# Altium PCB PCB2.PcbDoc
Units mil, origin at the board's own origin, x right, y up, seen from the top; angles counter-clockwise.
Board outline 2295 x 2275 mil, 2 copper layers (Top Layer, Bottom Layer); 65 components, 55 nets, 272 pads, 127 vias.
Unrouted connection lines stored in the file: 4.
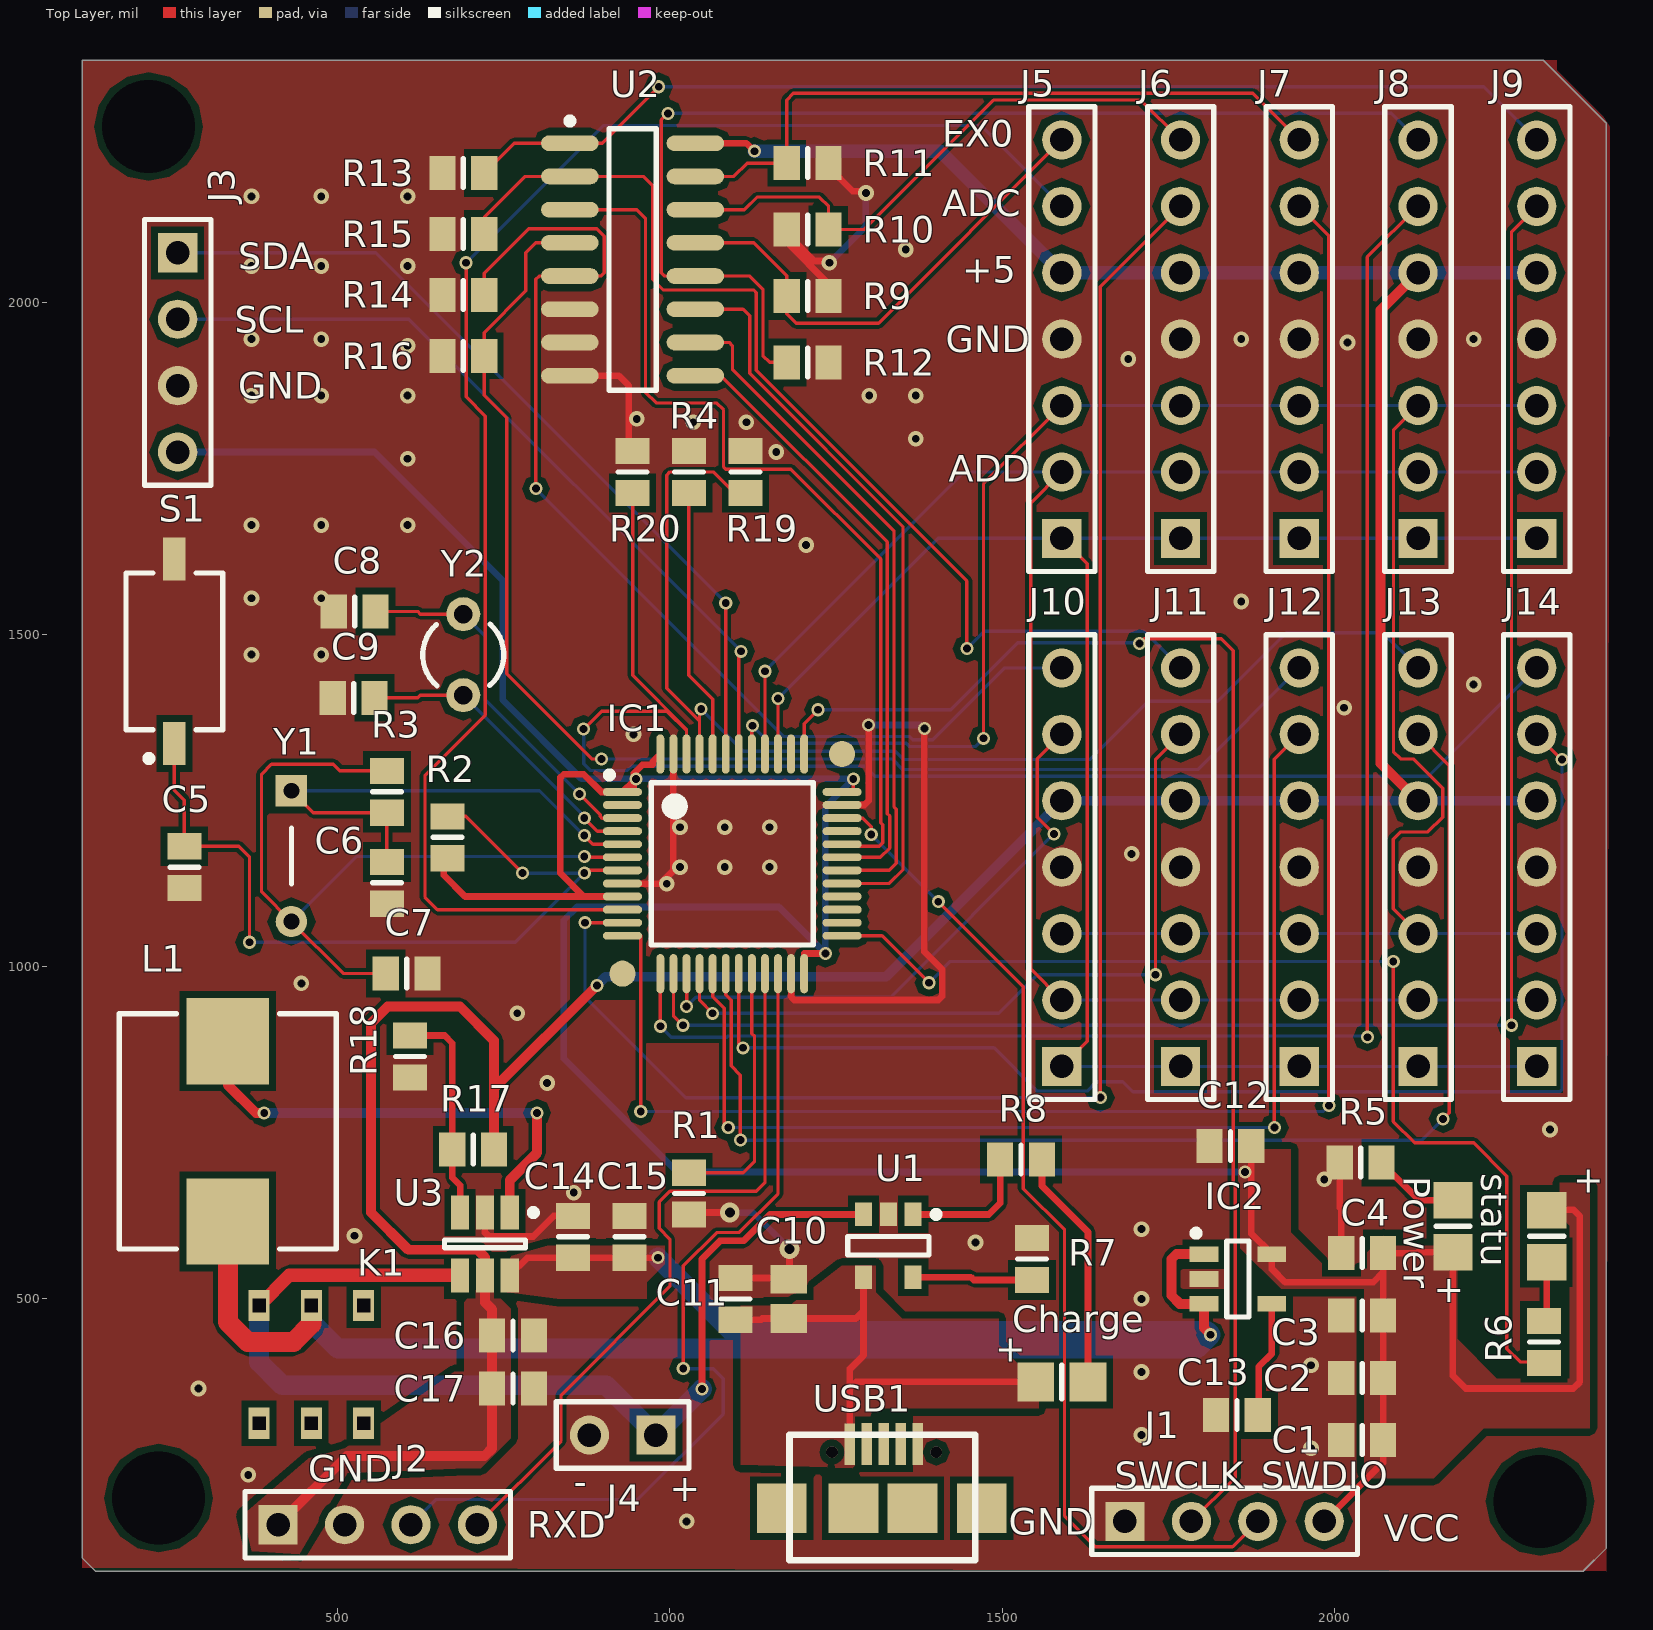
[diagram p0: Top Layer view]
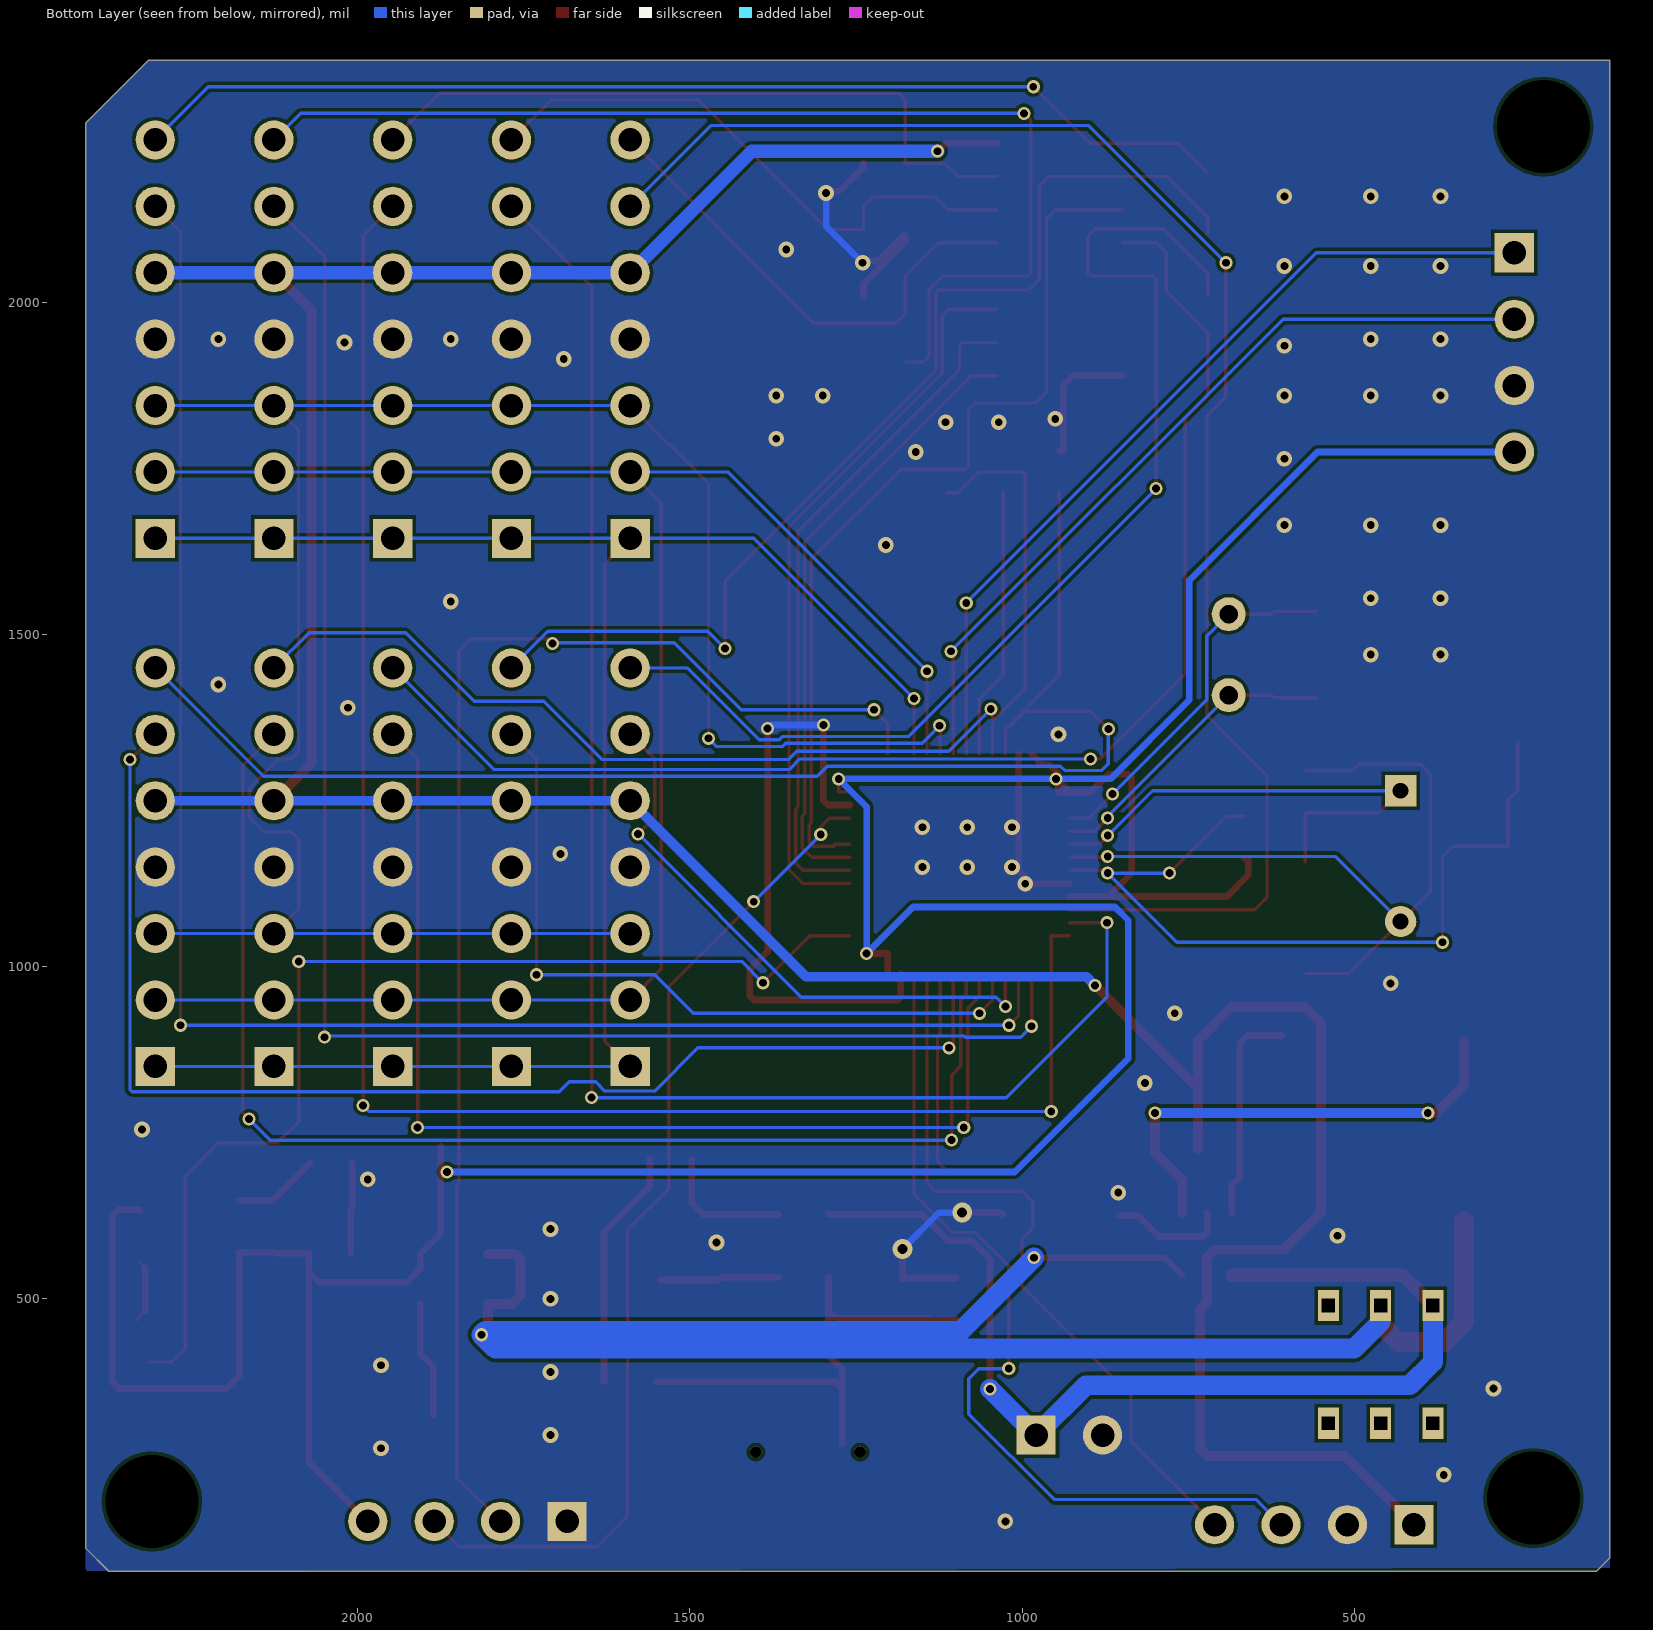
[diagram p1: Bottom Layer view, seen from below]

## Layer stack, top to bottom
Top Solder: solder mask 0.4, Solder Resist, Dk 3.5
Top Layer: signal copper 1.4
Dielectric 1: dielectric 12.6, FR-4, Dk 4.8
Bottom Layer: signal copper 1.4
Bottom Solder: solder mask 0.4, Solder Resist, Dk 3.5

## Board outline
115,110 135,90 2375,90 2410,125 2410,2270 2315,2365 115,2365

## Design rules (kind name [scope] priority, off if disabled: settings)
Clearance Clearance_3 [InNamedPolygon('Top Layer-BAT') Or  InNamedPolygon('Top Layer-No Net') Or  InNamedPolygon('Top Layer-POWER') Or  InNamedPolygon('Top Layer-GND') Or  InNamedPolygon('Top Layer-+5') Or  InNamedPolygon('Top Layer-VCC3.3')] p1: gap=5 ignorepadtopadclearanceinfootprint=FALSE except(10: SMDPad-THPad SMDPad-Fill SMDPad-Poly SMDPad-Region THPad-THPad THPad-Fill THPad-Poly THPad-Region Via-Fill Via-Poly Via-Region Fill-Fill Fill-Poly Fill-Region Poly-Poly Poly-Region Region-Region)
Clearance Clearance_1 [All] p2: gap=5 ignorepadtopadclearanceinfootprint=TRUE
PlaneConnect [All] p1: planeconnectstyle=Direct reliefexpansion=20 reliefentries=4 reliefconductorwidth=10 reliefairgap=10
PolygonConnect [All] p1: connectstyle=Direct reliefconductorwidth=10 reliefentries=4 polygonreliefangle="90 Angle" airgapwidth=10
RoutingVias [All] p1: holewidth=11.81 width=19.68 viastyle="Through Hole" minholewidth=15 minwidth=30 maxholewidth=20 maxwidth=50
SolderMaskExpansion [All] p1: expansion=4
Width [InNetClass('Power')] p1: maxlimit=30 minlimit=10 preferedwidth=10 minimp=50.000000 maximp=50.000000 favimp=50.000000
Width Width_2 [InNetClass('All Nets')] p2: maxlimit=25 minlimit=5 preferedwidth=5 minimp=50.000000 maximp=50.000000 favimp=50.000000
29 further rules are at their usual default settings.

## Classes and differential pairs
net class POWER: +5 BAT BAT+ GND POWER

## Components (designator, comment, footprint, x,y, rotation, side; value= is the part's Value field where it differs from the comment)
C1 "0.1uf" 6-0805_L 2042.25,287.5 r0 top value=104
C2 "1uf" 6-0805_L 2042.25,381.25 r0 top
C3 "0.1uf" 6-0805_L 2042.25,475 r0 top value=104
C4 "0.1uf" 6-0805_L 2042.25,568.75 r0 top value=104
C5 "0.1uf" 6-0805_L 268.75,1150 r90 top value=104
C6 "22pF" 6-0805_L 573.75,1126.5 r90 top
C7 "22pF" 6-0805_L 603.5,990 r180 top
C8 "22pF" 6-0805_L 525.25,1535 r0 top
C9 "22pF" 6-0805_L 523.75,1405 r0 top
C10 "1uF" C0805 1178.75,500 r90 top
C11 "0.1uf" 6-0805_L 1098.75,500 r270 top value=104
C12 "2.2uF" 6-0805_L 1843.75,730 r0 top
C13 "470pF" 6-0805_L 1853.5,325 r0 top
C14 "10uF" 6-0805_L 853.75,593.5 r270 top
C15 "0.1uF" 6-0805_L 938.75,593.5 r270 top
C16 "0.1uf" 6-0805_L 763.75,445 r180 top
C17 "22uf" 6-0805_L 763.75,365 r180 top
Charge "LED_Green" 6-0805_M 1590,375 r0 top (schematic designator D3)
IC1 "STM32F103C8T6" LQFP48 1093.75,1155 r0 top
IC2 "MIC5205-3.3" SOT-23-5 1855,530 r0 top
J1 "CON4" HDR1X4 1685,165 r0 top
J2 "蓝牙" HDR1X4 410,160 r0 top
J3 "MPU6050" HDR1X4 258.75,2075 r270 top
J4 "BAT" HDR1X2 978.75,295 r180 top
J5 "CON7" HDR1X7 1590,1645 r90 top
J6 "CON7" HDR1X7 1768.75,1645 r90 top
J7 "CON7" HDR1X7 1947.5,1645 r90 top
J8 "CON7" HDR1X7 2126.25,1645 r90 top
J9 "CON7" HDR1X7 2305,1645 r90 top
J10 "CON7" HDR1X7 1590,850 r90 top
J11 "CON7" HDR1X7 1768.75,850 r90 top
J12 "CON7" HDR1X7 1947.5,850 r90 top
J13 "CON7" HDR1X7 2126.25,850 r90 top
J14 "CON7" HDR1X7 2305,850 r90 top
K1 "BUTTON" switch 538.75,490 r270 top
L1 "10UH" 0850 334.26,752.26 r90 top
Power "LED_Red" 6-0805_M 2178.75,609.37 r90 top (schematic designator D1)
R1 "10K" 6-0805_L 1028.75,658.5 r270 top
R2 "10K" 6-0805_L 665,1195 r270 top
R3 "10M" 6-0805_L 573.75,1263.5 r90 top
R4 "10K" 6-0805_L 1028.75,1745 r270 top
R5 "1K" 6-0805_L 2040,705 r0 top
R6 "1K" 6-0805_L 2316.06,435 r90 top
R7 "330" 6-0805_L 1545,560 r90 top
R8 "330" 6-0805_L 1528.5,710 r0 top
R9 "10K" 6-0805_L 1207.25,2010 r180 top
R10 "10K" 6-0805_L 1207.25,2110 r0 top
R11 "10K" 6-0805_L 1207.25,2210 r180 top
R12 "10K" 6-0805_L 1207.25,1910 r180 top
R13 "10K" 6-0805_L 688.75,2195 r0 top
R14 "10K" 6-0805_L 688.75,2011.67 r0 top
R15 "10K" 6-0805_L 688.75,2103.33 r0 top
R16 "10K" 6-0805_L 688.75,1920 r0 top
R17 "525K" 6-0805_L 703.75,725 r180 top
R18 "100k" 6-0805_L 608.75,865 r270 top
R19 "10K" 6-0805_L 1113.75,1745 r270 top
R20 "10K" 6-0805_L 943.75,1745 r270 top
S1 "KEY_2P" button 253.75,1475 r90 top
statu "LED_Blue" 6-0805_M 2320,594.37 r270 top (schematic designator D2)
U1 "PW4054" SOT-23-CT5_L 1328.75,580 r270 top
U2 "CD4051BCM" M16A_N 943.75,2065 r0 top
U3 "PS7516" SOT23-6_M 721.35,582.76 r270 top
USB1 "MICRO USB" "MICRO USB" 1318.74,233.23 r0 top
Y1 "XTAL_8M" xtal 430,1265 r270 top
Y2 "XTAL_32.768K" R38 688.75,1470 r0 top

## Footprints (in the part's own frame and the unit in brackets; to place one, negate y for a bottom-side part, rotate by r counter-clockwise, add the part's x,y. Pads: shape width x height; smd on the part's side, far side on the other; paste and mask are expansions set on the pad)
6-0805_L [mm] "Chip Resistor, Body 2.0x1.2mm, IPC High Density"
  rect 1x1.3 smd: 1(-0.8,0) 2(0.8,0)
  silkscreen extent 0,-0.55 0,0.55, body extent -1.07,-0.7 1.07,0.7, height 0.7
6-0805_M [mm] "Chip Resistor, Body 2.0x1.2mm, IPC Low Density"
  rect 1.4x1.5 smd: 1(-1,0) 2(1,0)
  silkscreen extent 0,-0.65 0,0.65, body extent -1.07,-0.7 1.07,0.7, height 0.7
0850 [mm] "电感"
  rect 3.3x3.15 smd: 1(-3.45,0) 2(3.45,0)
  silkscreen extent -4.5,-4.15 4.5,4.15, body extent -4.5,-4.15 4.5,4.15, height 5
button [mm] "SODFL, 2-Leads, Body 3.70x8.00mm, IPC Medium Density"
  rect 1.65x0.85 smd: 1(-3.525,0) 2(3.525,0)
  silkscreen extent -4.22,-1.85 3,1.85, body extent -3,-1.85 3,1.85, height 2.5
C0805 [mm] "Chip Capacitor, Body 2.0x1.3mm, IPC High Density"
  rect 1.1x1.4 smd: 1(-0.75,0) 2(0.75,0)
  body extent -1.1,-0.72 1.1,0.72, height 1.4
HDR1X2 [mm] "Connector; Header; 2 Position"
  rect 1.5x1.5 hole 0.9: 1(0,0)
  round 1.5 hole 0.9: 2(2.54,0)
  silkscreen extent -1.27,-1.27 3.81,1.27
HDR1X4 [mm] "Connector; Header; 4 Position"
  rect 1.5x1.5 hole 0.9: 1(0,0)
  round 1.5 hole 0.9: 2(2.54,0) 3(5.08,0) 4(7.62,0)
  silkscreen extent -1.27,-1.27 8.89,1.27, body extent -1.27,-1.27 8.89,1.27, height 8.38
HDR1X7 [mm] "Connector; Header; 7 Position"
  rect 1.5x1.5 hole 0.9: 1(0,0)
  round 1.5 hole 0.9: 2(2.54,0) 3(5.08,0) 4(7.62,0) 5(10.16,0) 6(12.7,0) 7(15.24,0)
  silkscreen extent -1.27,-1.27 16.51,1.27
LQFP48 [mm]
  oval 1.5x0.3 smd: 1(-4.2,2.75) 2(-4.2,2.25) 3(-4.2,1.75) 4(-4.2,1.25) 5(-4.2,0.75) 6(-4.2,0.25) 7(-4.2,-0.25) 8(-4.2,-0.75) 9(-4.2,-1.25) 10(-4.2,-1.75) 11(-4.2,-2.25) 12(-4.2,-2.75) 25(4.2,-2.75) 26(4.2,-2.25) 27(4.2,-1.75) 28(4.2,-1.25) 29(4.2,-0.75) 30(4.2,-0.25) 31(4.2,0.25) 32(4.2,0.75) 33(4.2,1.25) 34(4.2,1.75) 35(4.2,2.25) 36(4.2,2.75)
  oval 0.3x1.5 smd: 13(-2.75,-4.2) 14(-2.25,-4.2) 15(-1.75,-4.2) 16(-1.25,-4.2) 17(-0.75,-4.2) 18(-0.25,-4.2) 19(0.25,-4.2) 20(0.75,-4.2) 21(1.25,-4.2) 22(1.75,-4.2) 23(2.25,-4.2) 24(2.75,-4.2) 37(2.75,4.2) 38(2.25,4.2) 39(1.75,4.2) 40(1.25,4.2) 41(0.75,4.2) 42(0.25,4.2) 43(-0.25,4.2) 44(-0.75,4.2) 45(-1.25,4.2) 46(-1.75,4.2) 47(-2.25,4.2) 48(-2.75,4.2)
  round 1 smd: 49(-4.2,-4.2) 50(4.2,4.2)
  silkscreen extent -4.82,-3.1 3.1,3.52, body extent -4.49,-4.5 4.5,4.5, height 1.6
M16A_N [mm] "SOIC, 16-Leads, Body 9.9x3.9mm, Pitch 1.27mm, IPC Medium Density"
  oval 2.2x0.6 smd: 1(-2.4,4.445) 2(-2.4,3.175) 3(-2.4,1.905) 4(-2.4,0.635) 5(-2.4,-0.635) 6(-2.4,-1.905) 7(-2.4,-3.175) 8(-2.4,-4.445) 9(2.4,-4.445) 10(2.4,-3.175) 11(2.4,-1.905) 12(2.4,-0.635) 13(2.4,0.635) 14(2.4,1.905) 15(2.4,3.175) 16(2.4,4.445)
  silkscreen extent -2.52,-5 0.9,5.42, body extent -2,-5 2,5, height 1.75
"MICRO USB" [mm]
  rect 0.4x1.6 smd: 1(-1.216,1.214) 2(-0.575,1.225) 3(0.075,1.225) 4(0.725,1.225) 5(1.375,1.225)
  rect 1.9x1.9 smd: ""(-3.825,-1.225) ""(-1.075,-1.225) ""(1.175,-1.225) ""(3.825,-1.225)
  silkscreen extent -3.53,-3.22 3.57,1.58, body extent -4.43,-3.77 4.38,1.82, height 2.54
R38 [mm] "Crystal, Thru-Hole; 2 Leads; Body 3.1 x 8.2 mm (Dia.xH)"
  round 1.3 hole 0.7: 1(0,1.55) 2(0,-1.55)
  silkscreen extent -1.55,-1.19 1.55,1.17
SOT23-6_M [mm] "SOT23, 6-Leads, Body 2.9x1.6mm, Pitch 0.95mm, Lead Span 2.7mm, IPC Low Density"
  rect 1.3x0.7 smd: 1(-1.2,0.95) 2(-1.2,0) 3(-1.2,-0.95) 4(1.2,-0.95) 5(1.2,0) 6(1.2,0.95)
  silkscreen extent -1.32,-1.55 0.15,1.98, body extent -0.9,-1.55 0.9,1.55, height 1.45
SOT-23-5 [mm]
  rect 1.1x0.6 smd: 1(-1.3,0.95) 2(-1.3,0) 3(-1.3,-0.95) 4(1.3,-0.95) 5(1.3,0.95)
  silkscreen extent -1.72,-1.45 0.42,1.87, body extent -1.37,-1.45 1.43,1.45, height 1.45
SOT-23-CT5_L [mm] "SOT23, 5-Leads, Body 2.9x1.6mm, Pitch 0.95mm, Lead Span 2.7mm, IPC High Density"
  rect 0.9x0.65 smd: 1(-1.2,0.95) 2(-1.2,0) 3(-1.2,-0.95) 4(1.2,-0.95) 5(1.2,0.95)
  silkscreen extent -1.32,-1.55 0.35,1.95, body extent -0.9,-1.55 0.9,1.55, height 1.45
switch [mm]
  rect 1.2x0.8 hole 0.5 square: 1(0,0) 2(0,-2) 3(0,-4) 4(4.5,0) 5(4.5,-2) 6(4.5,-4)
xtal [mm]
  rect 1.2x1.2 hole 0.6: 1(0,0)
  round 1.2 hole 0.6: 2(5,0)
  silkscreen extent 1.43,0 3.56,0

## Part data
C1 C2 C3 C4 C5 C6 C7 C8 C9 C11 C12 C13 C14 C15 C16 C17: library part "Cap Semi", "Capacitor (Semiconductor SIM Model)", LatestRevisionDate=29-May-2009, LatestRevisionNote="IPC-7351 Footprint Added.", PackageDescription="Chip Capacitor", PackageReference=C1206, Published=8-Jun-2000, Publisher="Altium Limited"
C10: library part "Cap Pol3", "Polarized Capacitor (Surface Mount)", LatestRevisionDate=29-May-2009, LatestRevisionNote="IPC-7351 Footprint Added.", PackageDescription="Chip Capacitor", PackageReference=C0805, Published=8-Jun-2000, Publisher="Altium Limited"
Charge Power statu: library part LED, "LED"
IC1: "单片机", ComponentLink1Description="Manufacturer Link", ComponentLink1URL=www.st.com/stm32, ComponentLink2Description=Datasheet, ComponentLink2URL=http://www.st.com/stonline/products/literature/ds/13587.pdf, DatasheetVersion="rev6, Mar-2008", PackageDescription="48-Pin Low-Profile Quad Flat Pack, 7 x 7 mm Body, 0.5 mm Pitch (LQFP48)", PackageReference=LQFP48, PackageVersion=Mar-2008, Published=30-May-2008, Publisher="Altium Limited"
IC2: "稳压"
J1: "连接器"
J2 J3: library part CON4, "Connector"
J4: library part CON2, "Conjunctor"
J5 J6 J7 J8 J9 J10 J11 J12 J13 J14: "Connector"
K1: "自锁按键"
L1: library part Inductor, "电感"
R1 R2 R3 R4 R5 R6 R7 R8 R9 R10 R11 R12 R13 R14 R15 R16 R17 R18 R19 R20: library part Res3, "Resistor", LatestRevisionDate=29-May-2009, LatestRevisionNote="IPC-7351 Footprint Added.", PackageDescription="Chip Resistor", PackageReference=J1-0603, Published=8-Jun-2000, Publisher="Altium Limited"
S1: "轻触按键2P"
U2: "8-Channel Analog Multiplexer/Demultiplexer", Code_IPC=SOIC127P600-16, ComponentLink1Description="Manufacturer Link", ComponentLink1URL=http://www.fairchildsemi.com/, ComponentLink2Description=Datasheet, ComponentLink2URL=http://www.fairchildsemi.com/ds/CD%2FCD4052BC.pdf, DatasheetVersion=Jan-1999, LatestRevisionDate=13-Apr-2006, LatestRevisionNote="IPC-7351 Footprint Added.", PackageDescription="16-Pin Small Outline Integrated Circuit 1.27 mm Pitch", PackageReference=M16A, PackageVersion=2000, Published=17-Jul-2002, Publisher="Altium Limited"
Y1 Y2: library part XTAL, "Crystal Oscillator", LatestRevisionDate=17-Jul-2002, LatestRevisionNote="Re-released for DXP Platform.", PackageDescription="Crystal, Thru-Hole; 2 Leads; Body 3.1 x 8.2 mm (Dia.xH)", PackageReference=R38, Published=8-Jun-2000, Publisher="Altium Limited"

## Free pads (board coordinates)
  rect 47.24x31.5 hole 140: ""(215,2265) ""(230,200) ""(2310,195)

## Via types
v1: diameter 23.62, hole 11.81, Top Layer to Bottom Layer, tented both sides, 64 vias
v2: diameter 19.68, hole 11.81, Top Layer to Bottom Layer, 59 vias
v3: diameter 30, hole 15, Top Layer to Bottom Layer, tented both sides, 2 vias
v4: diameter 17.72, hole 17.72, Top Layer to Bottom Layer, 2 vias

## Nets (pads, with @x,y where several pads share a name; then routed paths per layer and width w, separated by ;. In a path a pad name is that pad's centre, name@x,y a point inside that pad or via, vN(x,y) a via of type N, cw(c..) or ccw(c..) an arc to the next point about the centre after c; other vN are vias at no path point)
+5: C16.2 C17.2 J2.1 J5.5 J6.5 J7.5 J8.5 J9.5 J10.5 J11.5 J12.5 J13.5 J14.5 R17.1 U2.16 U3.5 | length 5465
  Top Layer w10: U2.16 1115,2240 v2(1127,2228)
  Top Layer w15: J2.1 513.51,263.51 720.76,263.51 732.25,275 C17.2 C16.2 732.25,484 721.35,494.91 U3.5 721.35,562.65 710,574 606,574 550,630 550,915 575,940 684,940 735.25,888.75 735.25,817.25 ; R17.1 735.25,817.25 ; v2(890,972) 735.25,817.25 ; J13.5 2070,1306.25 2070,1988.75 J8.5
  Bottom Layer w15: v2(890,972) 903,985 1325,985 J10.5 J11.5 J12.5 J13.5 J14.5
  Bottom Layer w20: v2(1127,2228) 1407,2228 J5.5 J6.5 J7.5 J8.5 J9.5
ADC0: IC1.10 J5.6 | length 2342.9
  Top Layer w5: v2(693,2060) 693,1858 722,1829 722,1379 631,1288 631,1105 649.9,1086.1 IC1.10
  Bottom Layer w5: v2(693,2060) 899.66,2266.66 1468.34,2266.66 J5.6
ADC1: IC1.11 J6.6 | length 2398.8
  Top Layer w5: v2(872,1066.42) IC1.11 ; v2(1647.97,802.97) 1647.97,2024.22 J6.6
  Bottom Layer w5: v2(872,1066.42) 872,955 1024.03,802.97 v2(1647.97,802.97)
ADC2: IC1.12 J7.6 | length 2704.5
  Top Layer w5: IC1.12 956,1046.73 v2(956,782) ; J7.6 1992,2100.5 v2(1992,791)
  Bottom Layer w5: v2(956,782) 1983,782 v2(1992,791)
ADC3: IC1.13 J8.6 | length 2434.7
  Top Layer w5: v2(985.48,910.52) IC1.13 ; v2(2050,894) 2050,2068.75 J8.6
  Bottom Layer w5: v2(985.48,910.52) 1002,894 1085.74,894 1087.66,895.92 2048.08,895.92 v2(2050,894)
ADC4: IC1.14 J9.6 | length 2579.9
  Top Layer w5: IC1.14 1005.17,926.17 v2(1019.34,912) ; v2(2267,912) 2267,2107 J9.6
  Bottom Layer w5: v2(1019.34,912) v2(2267,912)
ADC5: IC1.15 J10.6 | length 886.1
  Top Layer w5: IC1.15 1025,989.5 v2(1025,940) ; v2(1577.99,1199.99) 1552.97,1225 1552.97,1312.97 J10.6
  Bottom Layer w5: v2(1025,940) 1039.05,954.05 1332.05,954.05 v2(1577.99,1199.99)
ADC6: IC1.16 J11.6 | length 1136.4
  Top Layer w5: IC1.16 1044.54,949.46 v2(1064,930) ; v2(1731,988) 1731,1312.25 J11.6
  Bottom Layer w5: v2(1064,930) 1495,930 1553,988 v2(1731,988)
ADC7: IC1.17 J12.6 | length 1671.2
  Top Layer w5: IC1.17 1064.22,955 1081.77,937.45 1081.77,763.89 v2(1087.66,758) ; v2(1910,758) 1910,1312.5 J12.6
  Bottom Layer w5: v2(1087.66,758) v2(1910,758)
ADC8: IC1.18 J13.6 | length 1933.4
  Top Layer w5: IC1.18 1083.91,958.09 1092,950 1092,851 1106,837 v2(1106,739) ; J13.6 2173.28,1302.97 2173.28,780.28 v2(2164,771)
  Bottom Layer w5: v2(1106,739) 2132,739 v2(2164,771)
ADC9: IC1.19 J14.6 | length 1938.2
  Top Layer w5: IC1.19 1103.59,884.41 v2(1110,878) ; J14.6 v2(2343,1312)
  Bottom Layer w5: v2(1110,878) 1487.94,878 1552.97,812.97 1628,812.97 1642.03,827 1682,827 1697,812 2340,812 2343,815 v2(2343,1312)
Address_0: IC1.29 U2.11 | length 1115.6
  Top Layer w5: U2.11 1110,1990 1120,1980 1120,1893.36 1350.82,1662.55 1350.82,1146.29 1330,1125.47 IC1.29
Address_1: IC1.30 U2.10 | length 1025.3
  Top Layer w5: U2.10 1089,1940 1094,1935 1094,1899.36 1337.34,1656.02 1337.34,1240.57 1340.82,1237.1 1340.82,1155.98 1330,1145.16 IC1.30
Address_2: IC1.31 U2.9 | length 933.8
  Top Layer w5: U2.9 1079,1890 1079,1888 1327.34,1639.66 1327.34,1230.57 1330.82,1227.1 1330.82,1178.82 1316.84,1164.84 IC1.31
Address_3: IC1.39 J5.1 J6.1 J7.1 J8.1 J9.1 J10.1 J11.1 J12.1 J13.1 J14.1 | length 2867.3
  Top Layer w5: IC1.39 v2(1162.65,1403.97) ; J10.1 1628,888 1628,1607 J5.1
  Bottom Layer w5: v2(1162.65,1403.97) 1403.68,1645 J5.1 J6.1 J7.1 J8.1 J9.1 ; J10.1 J11.1 J12.1 J13.1 J14.1
Address_4: IC1.40 J5.2 J6.2 J7.2 J8.2 J9.2 J10.2 J11.2 J12.2 J13.2 J14.2 | length 2959.9
  Top Layer w5: IC1.40 v2(1142.96,1444.96) ; J10.2 1542.97,997.03 1542.97,1697.97 J5.2
  Bottom Layer w5: v2(1142.96,1444.96) 1443,1745 J5.2 J6.2 J7.2 J8.2 J9.2 ; J10.2 J11.2 J12.2 J13.2 J14.2
Address_5: IC1.41 J5.3 J6.3 J7.3 J8.3 J9.3 J10.3 J11.3 J12.3 J13.3 J14.3 | length 3311.3
  Top Layer w5: IC1.41 1123.28,1362.28 v2(1124,1363) ; v2(1472,1344) 1472,1727 J5.3 ; J13.3 2089,1087.25 2089,1192 2100,1203 2141,1203 2163.28,1225.28 2163.28,1268.72 2119.03,1312.97 2100,1312.97 2089.22,1323.75 2089.22,1807.97 J8.3
  Bottom Layer w5: v2(1124,1363) 1150.34,1336.66 1355.66,1336.66 1360.66,1331.66 1459.66,1331.66 v2(1472,1344) ; J10.3 J11.3 J12.3 J13.3 J14.3 ; J5.3 J6.3 J7.3 J8.3 J9.3
BAT: J4.1 K1.3 U1.3 U3.4 | length 1614.6
  Top Layer w10: v2(1048.16,364.41) 1048.16,560.16 1075.32,587.32 1110.93,587.32 1150.61,627 1291.35,627 U1.3
  Top Layer w20: K1.3 426.78,535.51 U3.4
  Bottom Layer w30: K1.3 381.27,405 416.27,370 903.75,370 J4.1 v2(1048.16,364.41)
BAT+: C14.2 C15.2 IC2.1 IC2.3 K1.2 L1.1 U3.6 | length 3059
  Top Layer w10: U3.6 785.25,562.01 C14.2 C15.2 v2(982,562.01)
  Top Layer w15: IC2.1 1762.4,567.4 1755,560 1755,505 1767.4,492.6 IC2.3 1803.82,456.18 v2(1814,446)
  Top Layer w30: L1.1 334.26,465 364.26,435 432.99,435 460.01,462.02 K1.2
  Bottom Layer w30: K1.2 460.01,465 500.01,425 1793,425 v2(1814,446) 1808,452 1092.01,452 v2(982,562.01)
BOOT0: IC1.44 R4.2 | length 409
  Top Layer w5: R4.2 1028,1713.5 1028,1439.18 1064.34,1402.83 1064.34,1370.78 1064.22,1370.66 IC1.44
BOOT1: IC1.20 R1.1 | length 389.8
  Top Layer w5: R1.1 1110,690 1127.34,707.34 1127.34,895.34 1123.28,899.41 IC1.20
Common_Out: IC1.32 U2.3 | length 1384.3
  Top Layer w5: U2.3 950,2140 963,2127 963,1865 979,1849 1070,1849 1080.66,1838.34 1080.66,1752.5 1083.85,1749.31 1182.05,1749.31 1317.34,1614.02 1317.34,1217.1 1320.34,1214.1 1320.34,1187 1315,1181.66 1282.66,1181.66 1282.66,1184.53 IC1.32
EX0: J5.7 R9.2 U2.13 | length 749.6
  Top Layer w5: U2.13 1126,2090 1175.76,2040.24 R9.2 1175.76,1983.24 1190,1969 1314,1969 J5.7
EX1: J6.7 R10.2 U2.14 | length 884.8
  Top Layer w5: U2.14 1112,2140 1131,2159 1224.75,2159 1238.75,2145 R10.2 1292,2110 1487,2305 1708.75,2305 J6.7
EX2: J7.7 R11.2 U2.15 | length 1045.7
  Top Layer w5: U2.15 1096,2190 1116,2210 R11.2 1175.76,2305 1185.76,2315 1877.5,2315 J7.7
EX3: J8.7 R12.2 U2.12 | length 1693.2
  Top Layer w5: v2(997,2285) 987,2275 987,2045 992,2040 U2.12 1120,2040 1140,2020 1140,1920 1150,1910 R12.2
  Bottom Layer w5: v2(997,2285) 2086.25,2285 J8.7
EX4: J9.7 R13.2 U2.1 | length 1671.7
  Top Layer w5: R13.2 765.25,2240 U2.1 898,2240 v2(983,2325)
  Bottom Layer w5: v2(983,2325) 2225,2325 J9.7
EX5: J10.7 R14.2 U2.5 | length 1716.1
  Top Layer w5: R14.2 720.25,2044 787.25,2111 890,2111 901,2100 901,2045 896,2040 U2.5 803,2040 798,2035 v2(798,1720)
  Bottom Layer w5: v2(798,1720) 1171.34,1346.66 1360.66,1346.66 1365.66,1341.66 1395.66,1341.66 1504,1450 J10.7
EX6: J11.7 R15.2 U2.2 | length 1637.9
  Top Layer w5: R15.2 720.25,2128.25 782,2190 U2.2 960,2190 974,2176 974,2035 990,2019 1126,2019 1130,2015 1130,1898 1447,1581 v2(1447,1479)
  Bottom Layer w5: v2(1447,1479) 1473,1505 1713.75,1505 J11.7
EX7: J12.7 R16.2 U2.4 | length 2062.9
  Top Layer w5: U2.4 798,2090 783,2075 783,2017.75 720.25,1955 R16.2 720.25,1860.75 754,1827 754,1441 882,1313 v2(897,1313)
  Bottom Layer w5: v2(897,1313) 1334.31,1313 1350.28,1297.03 1794.53,1297.03 J12.7
EX8: IC1.45 J13.7 R19.2 | length 1804.9
  Top Layer w5: IC1.45 1044.54,1370 ; v2(1047,1388) 1044.54,1385.54 1044.54,1370 ; R19.2 1096.5,1713.5 1065,1745 1000,1745 995,1740 995,1419.54 1044.54,1370
  Bottom Layer w5: v2(1047,1388) 1110.44,1324.56 1339.09,1324.56 1351.66,1312 1632,1312 1720,1400 1825,1400 1928,1503 2073.25,1503 J13.7
EX9: IC1.46 J14.7 R20.2 | length 2173.1
  Top Layer w5: v2(870,1358) 897,1385 995,1385 1024.85,1355.15 ; R20.2 944,1713.5 944,1438.85 1024.85,1358 IC1.46
  Bottom Layer w5: v2(870,1358) 870,1305.66 880,1295.66 936,1295.66 942.34,1302 1293,1302 1307.97,1287.03 2142.03,1287.03 J14.7
GND: C1.1 C2.1 C3.1 C4.1 C5.1 C6.1 C7.1 C8.1 C9.1 C10.2 C11.1 C12.1 C13.1 C14.1 C15.1 C16.1 C17.1 IC1.8 IC1.23 IC1.35 IC1.47 IC2.2 J1.1 J2.2 J3.3 J4.2 J5.4 J6.4 J7.4 J8.4 J9.4 J10.4 J11.4 J12.4 J13.4 J14.4 R1.2 R4.1 R5.1 R7.2 R9.1 R10.1 R11.1 R12.1 R13.1 R14.1 R15.1 R16.1 R18.2 R19.1 R20.1 S1.2 U1.2 U2.6 U2.7 U2.8 U3.2 USB1.5 | length 2404
  Top Layer w10: U3.2 721.35,600 727.35,594 794,594 825,625 C14.1 ; U2.8 923,1890 938,1875 938,1776.5 R20.1 ; IC1.8 928.74,1125.13 972.85,1125.13 972.98,1125 985,1125 1005.17,1145.17 IC1.47 ; R1.2 1031.74,630 v3(1090,630) ; C11.1 1176.78,531.5 C10.2 1180,530.78 v3(1180,575) ; IC1.23 1182.33,955 1187.33,950 1403.96,950 1409.84,955.88 1409.84,995.84 1383,1022.69 v2(1383,1359) ; R9.1 1238.75,2028 1175.76,2090.99 1175.76,2100.5 1179.36,2100.5 1217.25,2062.61 1237.39,2062.61 v1(1240,2060) ; R11.1 1238.75,2204.09 1275.24,2167.61 1292.39,2167.61 v1(1295,2165) ; IC1.35 1292.58,1243.58 1299,1250 v2(1299,1364) ; R5.1 2008.5,637.25 2010.76,635 C4.1
  Bottom Layer w10: v3(1090,630) 1090.41,629.59 1125.41,629.59 v3(1180,575) ; v1(1240,2060) 1295,2115 v1(1295,2165) ; v2(1299,1364) 1378,1364 v2(1383,1359)
  other v1: 1025,165 365,235 1965,275 1710,295 290,365 1710,390 1965,400 1710,500 1460,585 525,595 1710,605 855,660 1985,680 2325,755 815,825 770,930 445,975 995,1125 1015,1150 1082.5,1150 1150,1150 1695,1170 1015,1210 1082.5,1210 1150,1210 945,1350 2015,1390 2210,1425 370,1470 475,1470 1860,1550 370,1555 475,1555 1205,1635 370,1665 475,1665 605,1665 605,1765 1160,1775 1370,1795 1035,1820 1115,1820 950,1825 370,1860 475,1860 605,1860 1300,1860 1370,1860 1690,1915 605,1935 2020,1940 370,1945 475,1945 1860,1945 2210,1945 370,2055 475,2055 605,2055 1355,2080 370,2160 475,2160 605,2160
NetC13_2: C13.2 IC2.4 | length 175.8
  Top Layer w10: C13.2@1886.5,325 1886.5,398 1906.18,417.69 IC2.4
NetD1_2: Power.2 R5.2 | length 130.6
  Top Layer w10: R5.2 2127.76,648.74 Power.2
NetD2_2: R6.2 statu.2 | length 97
  Top Layer w5: R6.2@2320,481.74 R6.2@2333.75,467.99 ; statu.2@2320,546.88 statu.2@2328.75,555.63
  Top Layer w10: R6.2@2320,481.74 statu.2@2320,546.88
NetD3_2: Charge.2 R8.2 | length 363.7
  Top Layer w10: R8.2 1560,670 1629.37,600.63 Charge.2
NetIC1_34: IC1.34 J1.3 | length 1533.5
  Top Layer w5: IC1.34 1290,1223.9 1303,1210.9 v2(1303,1199) ; v2(1404,1098) 1532,970 1532,666 1594,604 1594,173 1640,127 1847,127 J1.3
  Bottom Layer w5: v2(1303,1199) v2(1404,1098)
NetIC1_37: IC1.37 J1.2 | length 2092.5
  Top Layer w5: IC1.37 1202.02,1366.02 v2(1223,1387) ; v2(1707,1487) 1714,1494 1830,1494 1848,1476 1848,674.22 1851,671.22 1851,231 J1.2
  Bottom Layer w5: v2(1223,1387) 1422.72,1387 1523.72,1488 1706,1488 v2(1707,1487)
NetL1_2: L1.2 U3.1 | length 716.2
  Top Layer w15: L1.2 334.26,822.24 376.5,780 v2(389,780) ; U3.1 758.75,678.75 800,720 v2(800,780)
  Bottom Layer w15: v2(389,780) v2(800,780)
NetR7_1: R7.1 U1.5 | length 180.6
  Top Layer w10: U1.5 1453,532.76 1457.25,528.5 R7.1
NetR8_1: R8.1 U1.1 | length 204.1
  Top Layer w10: U1.1 1366.15,627 1480,627 1497.01,644.01 R8.1
NetR17_2: R17.2 R18.1 U3.3 | length 328.1
  Top Layer w10: R18.1 660.76,896.5 672.25,885 R17.2 672.25,682.69 683.95,671 U3.3
NRST: C5.2 IC1.7 R2.1 S1.1 | length 1241.6
  Top Layer w5: S1.1 253.75,1266 268.75,1251 C5.2 350.5,1181.5 367,1165 v2(367,1037) ; R2.1 692.5,1226.5 v2(778,1141) ; v2(871,1141) 875.16,1145.16 IC1.7
  Bottom Layer w5: v2(367,1037) 767,1037 v2(871,1141) v2(778,1141)
PB12: IC1.25 R6.1 | length 1641.7
  Top Layer w5: IC1.25 1319.27,1046.73 v2(1390,976) ; v2(2089,1008) 2089,767 2121,735 2210,735 2260,685 2260,425 2280,405 R6.1@2315,405
  Bottom Layer w5: v2(1390,976) 1422,1008 v2(2089,1008)
POWER: C10.1 C11.2 Charge.1 U1.4 USB1.1 | length 742.2
  Top Layer w10: C11.2 1137,468.5 1138.97,470.47 C10.1 1280,470.47 1291.35,481.82 ; USB1.1 1270.87,365 ; U1.4 1291.35,481.82 ; Charge.1 1280.87,375 1270.87,365 ; 1270.87,365 1270.87,394.52 1291.35,415 1291.35,481.82
RXD1: IC1.21 J2.4 | length 1098.4
  Top Layer w5: J2.4 836,286 836,355 1000,519 1000,590 984,606 984,646 1000,662 1130,662 1142.96,674.96 IC1.21
SCL: IC1.42 J3.2 | length 1211.4
  Top Layer w5: IC1.42 1103.59,1471.59 v2(1107,1475)
  Bottom Layer w5: J3.2 607,1975 v2(1107,1475)
SDA: IC1.43 J3.1 | length 1271.2
  Top Layer w5: IC1.43 1083.91,1547.91 v2(1084,1548)
  Bottom Layer w5: J3.1 557,2075 v2(1084,1548)
TXD1: IC1.22 J2.3 | length 1332.1
  Top Layer w5: v2(1020,395) 1020,549.68 1070.14,599.82 1103.82,599.82 1162.65,658.65 IC1.22
  Bottom Layer w5: J2.3 648,198 951.41,198 1080,326.59 1080,380 1065,395 v2(1020,395)
VCC3.3: C1.2 C2.2 C3.2 C4.2 C12.2 IC1.1 IC1.9 IC1.24 IC1.36 IC1.48 IC2.5 J1.4 J3.4 Power.1 R2.2 statu.1 | length 5805.1
  Top Layer w5: IC1.36 1276,1263.27 v2(1276,1283)
  Top Layer w10: R2.2 659.34,1163.5 659.34,1138.04 691.59,1105.79 870,1105.79 ; IC1.9 870,1105.79 ; IC1.1@929,1263.27 945.34,1263.27 v2@945.34,1280.22 ; v2(948.73,1283) v2@945.34,1283 ; IC1.48 973.83,1308.7 973.83,1304 958.34,1304 945.34,1291 v2@945.34,1283 ; IC1.24 1202.02,1020 v2(1234,1020) ; v2(1866,691) 1875.25,700.25 ; C12.2 1875.25,700.25 ; J1.4 2073.75,253.75 C1.2 C2.2 C3.2 2073.75,540 ; statu.1@2328.75,634.37 2360,634.37 2370,624.37 2370,375 2360,365 2198,365 2178.75,384.25 Power.1 2126.25,570 2125,568.75 C4.2 2073.75,540 ; 870,1105.79 835,1140.79 835,1285 840,1290 869.91,1290 896.64,1263.27 IC1.1 v2@945.34,1280.22 ; v2@945.34,1280.22 v2@945.34,1283 ; 1875.25,700.25 1875.25,598.34 IC2.5 1906.18,545 1926.18,525 2058.75,525 2073.75,540
  Bottom Layer w10: J3.4 555,1775 748,1582 748,1402 867,1283 v2(948.73,1283) v2(1276,1283) 1234,1241 v2(1234,1020) 1164,1090 860,1090 840,1070 840,862 1011,691 v2(1866,691)
XTAL_A: C6.2 IC1.5 R3.1 Y1.1 | length 763.2
  Top Layer w5: Y1.1 462.99,1232.01 R3.1 C6.2 ; v2(871,1197.53) 884,1184.53 IC1.5
  Bottom Layer w5: Y1.1 803.53,1265 v2(871,1197.53)
XTAL_B: C7.2 IC1.6 R3.2 Y1.2 | length 1153.4
  Top Layer w5: C7.2 508.15,990 Y1.2 385,1113.15 385,1290 400,1305 493,1305 503,1295 R3.2 ; v2(871,1166) 872.16,1164.84 IC1.6
  Bottom Layer w5: Y1.2 527.85,1166 v2(871,1166)
XTAL_C: C8.2 IC1.3 Y2.1 | length 558.1
  Top Layer w5: C8.2 620,1535 623.98,1531.02 Y2.1 ; v2(864,1260) 895,1229 895,1226.4 897.5,1223.9 IC1.3
  Bottom Layer w5: Y2.1 722,1497.77 722,1402 v2(864,1260)
XTAL_D: C9.2 IC1.4 Y2.2 | length 461.2
  Top Layer w5: C9.2 620,1405 623.98,1408.98 Y2.2 ; v2(871,1224) 890.79,1204.21 IC1.4
  Bottom Layer w5: Y2.2 871,1226.73 v2(871,1224)
pads on no net: IC1.2 IC1.26 IC1.27 IC1.28 IC1.33 IC1.38 IC1.49 IC1.50 K1.1 K1.4 K1.5 K1.6 USB1. USB1.2 USB1.3 USB1.4
copper on no net:
  other v4: 1243.74,269.23 1400.74,269.23

## Polygon pours and split planes (outlines as drawn)
VCC3.3 on Top Layer "Top Layer-VCC3.3" (solid, remove dead copper, pour order 40): 1875.25,730 1880.25,725 1935,725 1935,600 1990,545 2050,545 2050,570 2075,595 2090,580 2185,580 2185,440 2245,380 2355,380 2355,610 2340,625 2340,675 2380,675 2385,670 2385,305 2225,305 2150,230 2055,230 2045,240 2045,515 1920,515 1855,580 1855,725
BAT+ on Top Layer "Top Layer-BAT+" (solid, remove dead copper, pour order 39): 755.34,555.47 755.34,510 830,500 845,500 965,500 965,525 995,555 995,580 815,580 762.06,564.87
+5 on Top Layer "Top Layer-+5" (solid, remove dead copper, pour order 38): 357.8,174.92 370,120 441.83,115.51 513.81,237.12 695,245 715,245 760,290 760,485 720,525 715,525 715,520 690,495 690,390 675,390 510,275 456.32,260
no net on Top Layer "Top Layer-No Net" (solid, remove dead copper, pour order 37): 1120,355
POWER on Top Layer "Top Layer-POWER" (solid, remove dead copper, pour order 36): 1106.31,490 1106.31,250 1280,245 1305,335 1555,335 1555,370.63 1495,430.63 1495,470 1350,470 1310,510 1310,550 1258.28,550 1180,490
GND on Top Layer "Top Layer-GND" (solid, remove dead copper, pour order 42): 115,2365 2335,2365 2335,2350 2405,2280 2415,2265 2410,90 115,95
GND on Bottom Layer "Bottom Layer-GND" (solid, remove dead copper, pour order 41): 115,2365 2315,2365 2410,2270 2410,90 115,95

## Other copper
Top Layer:
  pour cut-out: 965,885 1075,885 1081.77,891.77 1081.77,937.45 992.45,937.45 960,905 960,880
  pour cut-out: 850.81,1077.98 850,1077.17 850,950 950,950 955,955 955,1065

## Silkscreen, mask and mechanical layers (free items; w line width, h text height)
Top Overlay:
  text "EX0" at 1410,2235 h40
  text "ADC" at 1410,2130 h40
  text "SDA" at 350,2050 h40
  text "+5" at 1440,2030 h40
  text "SCL" at 345,1955 h40
  text "GND" at 1415,1925 h40
  text "GND" at 350,1855 h40
  text "ADD" at 1420,1730 h40
  text "+" at 2360,660 h40
  text "+" at 2150,495 h40
  text "+" at 1490,405 h40
  text "GND" at 455,225 h40
  text "SWCLK" at 1670,215 h40
  text "SWDIO" at 1890,215 h40
  text "-" at 855,205 h40
  text "+" at 1000,195 h40
  text "GND" at 1510,145 h40
  text "RXD" at 785,140 h40
  text "VCC" at 2075,135 h40
Mechanical 1:
  the board outline again, w10
Drill Drawing:
  text ".Lengend" at 2790,2055 h40

## Text inside footprints (layer, text, board x,y; h text height)
IC2: Mechanical 15 "1" at 1872.71,523.53 h40 r90